# Altium PCB Brake Light Flasher.PcbDoc
Units mm, origin at the board's own origin, x right, y up, seen from the top; angles counter-clockwise.
Board outline 22.5 x 17.5 mm, 2 copper layers (L1, L2), stack 1.571 mm thick; 36 components, 22 nets, 92 pads, 32 vias.
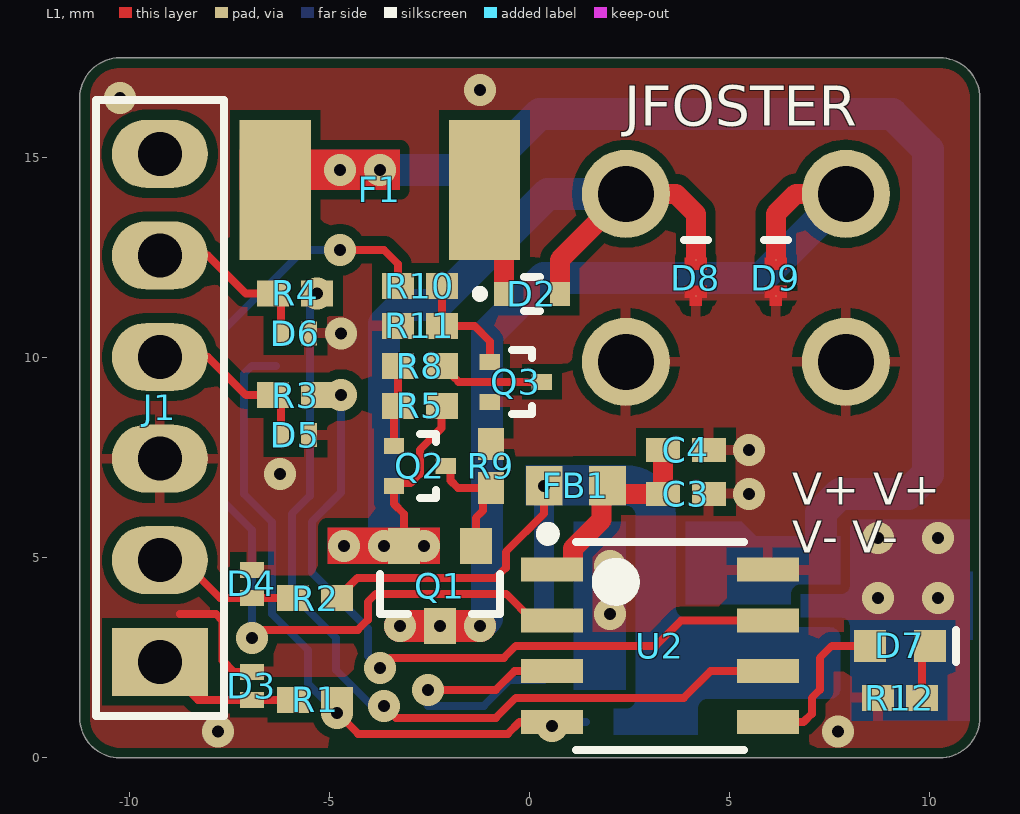
[diagram p0: L1 view]
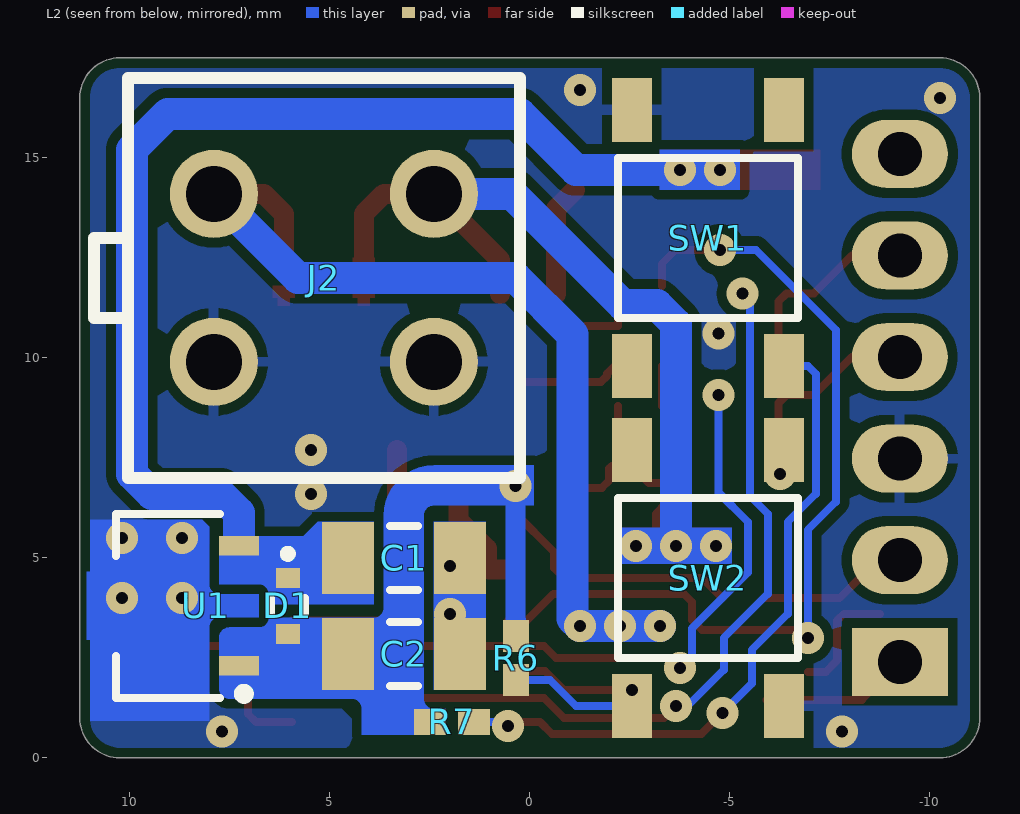
[diagram p1: L2 view, seen from below]

## Layer stack, top to bottom
Top Solder: solder mask 0.0102, Solder Resist, Dk 3.5
L1: signal copper 0.0356
Dielectric 1: dielectric 1.5, FR-4, Dk 4.8
L2: signal copper 0.0356
Bottom Solder: solder mask 0.0102, Solder Resist, Dk 3.5

## Board outline
-11.25,1 ccw(c-10.25,1) -10.25,0 10.25,0 ccw(c10.25,1) 11.25,1 11.25,16.5 ccw(c10.25,16.5) 10.25,17.5 -10.25,17.5 ccw(c-10.25,16.5) -11.25,16.5

## Design rules (kind name [scope] priority, off if disabled: settings)
BoardOutlineClearance BoardOutlineClearance_Silk [( HasFootprint('MOLEX_0039281043') Or HasFootprint('MICROCHIP_PKG_SOIC-8(C04-2057-SN)') ) And OnSilkscreen] p1: gap=0 ignorepadtopadclearanceinfootprint=FALSE
BoardOutlineClearance BoardOutlineClearance_UMW [HasFootprint('UMW_PKG_SOT-89-3')] p2: gap=0.15 ignorepadtopadclearanceinfootprint=FALSE except(0: Arc-SplitContinuation Track-SplitContinuation SMDPad-SplitContinuation THPad-SplitContinuation Via-SplitContinuation Fill-SplitContinuation Poly-SplitContinuation Region-SplitContinuation Text-SplitContinuation)
BoardOutlineClearance [All] p3: gap=0.25 ignorepadtopadclearanceinfootprint=FALSE except(0: Arc-SplitContinuation Track-SplitContinuation SMDPad-SplitContinuation THPad-SplitContinuation Via-SplitContinuation Fill-SplitContinuation Poly-SplitContinuation Region-SplitContinuation Text-SplitContinuation)
Clearance Clearance_78L05 [HasFootprint('UMW_PKG_SOT-89-3')] p1: gap=0.1 ignorepadtopadclearanceinfootprint=FALSE except(0.24: Arc-Fill Arc-Poly Arc-Region Track-Fill Track-Poly Track-Region SMDPad-Fill SMDPad-Poly SMDPad-Region THPad-Fill THPad-Poly THPad-Region Via-Fill Via-Poly Via-Region Fill-Fill Fill-Poly Fill-Region Poly-Poly Poly-Region Region-Region)
Clearance [All] p2: gap=0.1 ignorepadtopadclearanceinfootprint=FALSE except(0.245: Arc-Region Track-Region SMDPad-Region THPad-Region Via-Region Fill-Region Region-Region; 0.25: Arc-Fill Arc-Poly Track-Fill Track-Poly SMDPad-Fill SMDPad-Poly THPad-Fill THPad-Poly Via-Fill Via-Poly Fill-Fill Fill-Poly Poly-Poly Poly-Region)
MinimumSolderMaskSliver [All] p1: minsoldermaskwidth=0.1
PolygonConnect PolygonConnect_Via [IsVia] p1: connectstyle=Direct reliefconductorwidth=0.25 reliefentries=4 polygonreliefangle="90 Angle" airgapwidth=0.254
PolygonConnect PolygonConnect_Def [All] p2: connectstyle=Relief reliefconductorwidth=0.25 reliefentries=4 polygonreliefangle="90 Angle" airgapwidth=0.25
RoutingVias [All] p1: holewidth=0.711 width=1.27 viastyle="Through Hole" minholewidth=0.711 minwidth=1.27 maxholewidth=0.711 maxwidth=1.27
SilkToSolderMaskClearance [IsPad] p1: minsilkscreentomaskgap=0.15 clearancetoexposedcopper=TRUE
SolderMaskExpansion SolderMaskExpansion_Via [IsVia] p1: expansion=0 istentingtop=TRUE
SolderMaskExpansion [All] p2: expansion=0.05 istentingtop=FALSE
Width [All] p1: maxlimit=3 minlimit=0.1 preferedwidth=0.3
28 further rules are at their usual default settings.

## Classes and differential pairs
component class "Brake Light Flasher": C1 C2 C3 C4 D1 D2 D3 D4 D5 D7 D8 D9 F1 FB1 J1 J2 Q1 Q2 Q3 R1 R2 R4 R5 R6 R7 R8 R9 R10 R11 R12 SW1 SW2 U1 U2

## Components (designator, comment, footprint, x,y, rotation, side; value= is the part's Value field where it differs from the comment)
C1 "10uF,20%,50V,X5R,1206" CAPC3216X16N 3.15,5 r0 bottom value=10u
C2 "10uF,20%,50V,X5R,1206" CAPC3216X16N 3.15,2.6 r0 bottom value=10u
C3 "1nF,10%,50V,X7R,0402" CAPC1005X06N 3.9,6.6 r180 top value=1n
C4 "100nF,10%,50V,X7R,0402" CAPC1005X06N 3.9,7.7 r180 top value=100n
D1 "1N4148WT" ONSEMI_PKG_SOD-523F 6.05,3.8 r270 bottom
D2 "1N4148WT" ONSEMI_PKG_SOD-523F 0.05,11.6 r0 top
D3 "ESDSLC5V0LB-TP" MICROCOMMERCIAL_DFN1006-2_NPOL -6.95,1.801 r270 top
D4 "ESDSLC5V0LB-TP" MICROCOMMERCIAL_DFN1006-2_NPOL -6.95,4.35 r270 top
D5 "ESDSLC5V0LB-TP" MICROCOMMERCIAL_DFN1006-2_NPOL -5.867,8.07 r180 top
D6 "ESDSLC5V0LB-TP" MICROCOMMERCIAL_DFN1006-2_NPOL -5.867,10.61 r180 top
D7 "Yellow" LITE-ON_LTST-C190KSKT 9.25,2.8 r0 top
D8 "VESD12C1-HD1-G3-08" VISHAY_PKG_DFN1006-2A 4.15,12 r270 top
D9 "VESD12C1-HD1-G3-08" VISHAY_PKG_DFN1006-2A 6.15,12 r270 top
F1 "500mA" BELFUSE_CHIP1812 -3.75,14.2 r180 top
FB1 "600R,0603" INDC_0603 1.15,6.8 r180 top
J1 "Term,Header,6 Pin,Top,2.54mm" WURTH_61300611121 -9.25,8.75 r90 top
J2 "0039281043" MOLEX_0039281043 5.15,12 r270 bottom
Q1 "DMP3099L-7" DIODES_SOT23 -2.25,4.3 r270 top
Q2 "MMBT4403T-7-F" DIODES_SOT523 -2.75,7.3 r0 top
Q3 "MMBT2222AT-7-F" SOTFL50P160X90-3N -0.35,9.4 r0 top
R1 "49R9,1%,0.063W,0402" RESC1005X04N -5.367,1.45 r0 top value=49.9
R2 "150R,1%,0.063W,0402" RESC1005X04N -5.367,3.99 r180 top value=150
R3 "49R9,1%,0.063W,0402" RESC1005X04N -5.867,9.07 r0 top value=49.9
R4 "49R9,1%,0.063W,0402" RESC1005X04N -5.867,11.61 r0 top value=49.9
R5 "10k,5%,0.063W,0402" RESC1005X04N -2.75,8.8 r0 top value=10k
R6 "10k,5%,0.063W,0402" RESC1005X04N 0.35,2.5 r90 bottom value=10k
R7 "10k,5%,0.063W,0402" RESC1005X04N 1.95,0.9 r0 bottom value=10k
R8 "10k,5%,0.063W,0402" RESC1005X04N -2.75,9.8 r180 top value=10k
R9 "10k,5%,0.063W,0402" RESC1005X04N -0.975,7.3 r270 top value=10k
R10 "10k,5%,0.063W,0402" RESC1005X04N -2.75,11.8 r180 top value=10k
R11 "10k,5%,0.063W,0402" RESC1005X04N -2.75,10.8 r0 top value=10k
R12 "620R,1%,0.063W,0402" RESC1005X04N 9.25,1.5 r180 top value=620
SW1 "PTS525SM15SMTR2 LFS" "C&K_PTS525SM15SMTR2 LFS" -4.45,13 r270 bottom
SW2 "PTS525SM15SMTR2 LFS" "C&K_PTS525SM15SMTR2 LFS" -4.45,4.5 r90 bottom
U1 "L78L05A(UMW)" UMW_PKG_SOT-89-3 9.05,3.8 r90 bottom
U2 "PIC16F15213-I/SN" MICROCHIP_PKG_SOIC-8(C04-2057-SN) 3.25,2.8 r0 top

## Footprints (in the part's own frame and the unit in brackets; to place one, negate y for a bottom-side part, rotate by r counter-clockwise, add the part's x,y. Pads: shape width x height; smd on the part's side, far side on the other; paste and mask are expansions set on the pad)
BELFUSE_CHIP1812 [mm] "BELFUSE_CHIP1812"
  rect 1.78x3.5 smd: 1(-2.615,0) 2(2.615,0)
  body extent -2.27,-1.62 2.27,1.62, height 0.7
"C&K_PTS525SM15SMTR2 LFS" [mm] "C&K_PTS525SM15SMTR2 LFS"
  rect 1.6x1 smd mask+0.05: 1(-3.2,1.9) 2(3.2,1.9) 3(-3.2,-1.9) 4(3.2,-1.9)
  silkscreen extent -2,-2.25 2,2.25, body extent -3.2,-2.55 3.2,2.55, height 1.6
CAPC1005X06N [mm]
  rect 0.85x0.6 smd: 1(-0.575,0) 2(0.575,0)
  body extent -0.53,-0.28 0.53,0.27, height 0.55
CAPC3216X16N [mm] "Chip Capacitor, 2-Leads, Body 3.20x1.60mm, IPC Medium Density"
  rect 1.3x1.8 smd: 1(-1.4,0) 2(1.4,0)
  silkscreen extent -0.35,-0.8 0.35,0.8, body extent -1.75,-0.95 1.75,0.95, height 1.6
DIODES_SOT23 [mm] "DIODES_SOT23"
  rect 0.9x0.8 smd: 1(-1,0.9) 2(-1,-0.9) 3(1,0)
  silkscreen extent -0.3,-1.5 0.7,1.5, body extent -0.7,-1.5 0.7,1.5, height 1.15
DIODES_SOT523 [mm] "DIODES_SOT523"
  rect 0.51x0.4 smd mask+0.05: 1(-0.645,0.5) 2(-0.645,-0.5) 3(0.645,0)
  silkscreen extent 0,-0.8 0.4,0.8, body extent -0.8,-0.78 0.8,0.8, height 0.76
INDC_0603 [mm]
  rect 0.92x0.98 smd: 1(-0.79,0) 2(0.79,0)
  body extent -0.88,-0.48 0.87,0.47, height 0.95
LITE-ON_LTST-C190KSKT [mm] "LITE-ON_LTST-C190KSKT"
  rect 0.8x0.8 smd: A(-0.75,0) C(0.75,0)
  silkscreen extent 1.4,-0.4 1.4,0.4, body extent -0.8,-0.4 0.8,0.4, height 0.8
MICROCHIP_PKG_SOIC-8(C04-2057-SN) [mm]
  rect 1.55x0.6 smd: 1(-2.7,1.905) 2(-2.7,0.635) 3(-2.7,-0.635) 4(-2.7,-1.905) 5(2.7,-1.905) 6(2.7,-0.635) 7(2.7,0.635) 8(2.7,1.905)
  silkscreen extent -2.95,-2.6 2.1,2.95, body extent -2.1,-2.6 2.1,2.6, height 1.75
MICROCOMMERCIAL_DFN1006-2_NPOL [mm] "MICROCOMMERCIAL_DFN1006-2_NPOL"
  rect 0.4x0.6 smd: 1(-0.35,0) 2(0.35,0)
  body extent -0.5,-0.3 0.5,0.3, height 0.55
MOLEX_0039281043 [mm]
  round 2.2 hole 1.4: 1(-2.1,2.75) 2(2.1,2.75) 3(-2.1,-2.75) 4(2.1,-2.75)
  silkscreen extent -5,-5.75 5,4.9, body extent -5.2,-6 5.2,5, height 12.8
ONSEMI_PKG_SOD-523F [mm]
  rect 0.5x0.6 smd: 1(-0.7,0) 2(0.7,0)
  silkscreen extent -1.4,-0.43 0.2,0.43, body extent -0.63,-0.43 0.63,0.43, height 0.65
RESC1005X04N [mm] "Chip Resistor, 2-Leads, Body 1.0x0.5mm, IPC Medium Density"
  rect 0.8x0.65 smd: 1(-0.55,0) 2(0.55,0)
  body extent -0.52,-0.27 0.53,0.28, height 0.4
SOTFL50P160X90-3N [mm] "SOTFL, 3-Leads, Body 1.60x1.60mm, Pitch 0.50mm, IPC Medium Density"
  rect 0.51x0.4 smd: 1(-0.65,0.5) 2(-0.65,-0.5) 3(0.65,0)
  silkscreen extent -0.1,-0.8 0.4,0.8, body extent -0.4,-0.8 0.4,0.8, height 0.9
UMW_PKG_SOT-89-3 [mm]
  rect 0.48x1 smd: 1(-1.5,-1.775) 3(1.5,-1.775)
  round 0.025 smd: 2(0,-0.125)
  L1 region: -0.53,-1.035 -0.438,-1.053 -0.36,-1.105 -0.308,-1.183 -0.29,-1.275 -0.29,-1.275 -0.29,-2.275 0.29,-2.275 0.29,-1.275 0.308,-1.183 0.36,-1.105 0.438,-1.053 0.53,-1.035 0.53,-1.035 0.85,-1.035 0.942,-1.017 1.02,-0.965 1.072,-0.887 1.09,-0.795 1.09,-0.795 1.09,1.035 0.998,1.053 0.92,1.105 0.868,1.183 0.85,1.275 0.85,1.275 0.85,2.025 -0.21,2.025 -0.21,2.025 -0.85,2.025 -0.85,1.275 -0.868,1.183 -0.92,1.105 -0.998,1.053 -1.09,1.035 -1.09,1.035 -1.09,-0.795 -1.072,-0.887 -1.02,-0.965 -0.942,-1.017 -0.85,-1.035 -0.85,-1.035
  silkscreen extent -2.32,-2.02 2.3,1.3, body extent -2.27,-1.27 2.28,1.28, height 1.55
VISHAY_PKG_DFN1006-2A [mil]
  round 1 smd: 1(17.72,0) 2(-17.72,0)
  L1 region: 27.56,-5.91 27.56,5.91 19.68,5.91 19.68,10.83 7.87,10.83 7.87,-10.83 19.68,-10.83 19.68,-5.91
  L1 region: -27.56,-5.91 -27.56,5.91 -19.68,5.91 -19.68,10.83 -7.87,10.83 -7.87,-10.83 -19.68,-10.83 -19.68,-5.91
  silkscreen extent -37,-12 -37,12, body extent -21,-13 21,13, height 20
WURTH_61300611121 [mm]
  rect 1.7x2.4 hole 1.1 mask+0.05: 1(-6.35,0)
  oval 1.7x2.4 hole 1.1 mask+0.05: 2(-3.81,0) 3(-1.27,0) 4(1.27,0) 5(3.81,0) 6(6.35,0)
  silkscreen extent -7.7,-1.6 7.7,1.6, body extent -7.62,-1.27 7.62,1.27, height 8.55

## Part data
C1 C2: library part CAP,Cer,10uF,50VDC,X5R,1206, "10ï¿½F ï¿½20% 50V Ceramic Capacitor X5R 1206 (3216 Metric)", Manufacturer 1="Samsung Electro-Mechanics", Manufacturer 1 Part Number=CL31A106MBHNNNE, Vendor 1 Part Number=1276-6736-1-ND, CreatedBy="Judd Foster", HelpURL=https://www.samsungsem.com/resources/file/global/support/product_catalog/MLCC.pdf, Part Name=CAP,Cer,10uF,50VDC,X5R,1206, Vendor 1=Digikey
C3: library part CAP,Cer,1nF,10%,50V,X7R,0402, "1000pF ï¿½10% 50V Ceramic Capacitor X7R 0402 (1005 Metric)", Manufacturer 1="Murata Electronics", Manufacturer 1 Part Number=GCM155R71H102KA37D, Vendor 1 Part Number=490-4761-1-ND, CreatedBy="Judd Foster", HelpURL=https://www.murata.com/~/media/webrenewal/support/library/catalog/products/capacitor/mlcc/c03e.ashx?la=en-us, Part Name=CAP,Cer,1nF,10%,50V,X7R,0402, Vendor 1=Digikey
C4: library part CAP,Cer,100nF,10%,50V,X7R,0402, "50V 100nF X7R Â±10% 0402 Ceramic Capacitors ROHS", Manufacturer 1=Murata, Manufacturer 1 Part Number=GRM155R71H104KE14D, Vendor 1 Part Number=C77020, CreatedBy="Judd Foster", HelpURL=https://www.lcsc.com/datasheet/C77020.pdf, Part Name=CAP,Cer,100nF,10%,50V,X7R,0402, Vendor 1=LCSC
D1 D2: library part DIODE,Gen,75V,150mA,SOD523F, "Diode 75 V 200mA Surface Mount SOD-523F", Manufacturer 1=onsemi, Vendor 1 Part Number=1N4148WTCT-ND, CreatedBy="Judd Foster", HelpURL=https://mm.digikey.com/Volume0/opasdata/d220001/medias/docus/6621/1N914BWTCND.pdf, Manufacturer 1 Part Number=1N4148WT, Part Name=DIODE,Gen,75V,150mA,SOD523F, Vendor 1=DigiKey
D3 D4 D5 D6: library part DIODE,TVS,5.0V,SOD882, "20V Clamp 4A (8/20ï¿½s) Ipp Tvs Diode Surface Mount 2-DFN1006", Manufacturer 1="Micro Commercial Co", Vendor 1 Part Number=ESDSLC5V0LB-TPMSCT-ND, CreatedBy="Judd Foster", HelpURL=https://www.mccsemi.com/pdf/Products/ESDSLC5V0LB(DFN1006-2).pdf, Manufacturer 1 Part Number=ESDSLC5V0LB-TP, Part Name=DIODE,TVS,5.0V,SOD882, Vendor 1=Digikey
D7: library part LED,Yellow,SMD,0603, "Yellow 591nm LED Indication - Discrete 2.1V 0603 (1608 Metric)", Manufacturer 1="Lite-On Inc.", Manufacturer 1 Part Number=LTST-C190KSKT, Vendor 1 Part Number=160-1437-1-ND, CreatedBy="Judd Foster", HelpURL=https://optoelectronics.liteon.com/upload/download/DS-22-99-0189/LTST-C190KSKT.pdf, Part Name=LED,Yellow,SMD,0603, Vendor 1=Digikey
D8 D9: library part DIODE,ESD,12V,DFN1006-2A, "Transient Voltage Suppression Diodes - TVS ESD 12V UNI", Manufacturer 1=Vishay, Vendor 1 Part Number=78-VESD12C1-HD1-G308, CreatedBy="Judd Foster", HelpURL=https://www.vishay.com/docs/86185/vesd01c1-hd1tovesd33c1-hd1.pdf, Manufacturer 1 Part Number=VESD12C1-HD1-G3-08, Part Name=DIODE,ESD,12V,DFN1006-2A, Vendor 1=Mouser
F1: library part PTC,30V,500mA,1812, "Polymeric PTC Resettable Fuse 30V 500 mA Ih Surface Mount 1812 (4532 Metric), Concave", Manufacturer 1="Bel Fuse Inc.", Manufacturer 1 Part Number=0ZCG0050AF2C, Vendor 1 Part Number=507-1762-1-ND, CreatedBy="Judd Foster", HelpURL=https://www.belfuse.com/resources/datasheets/circuitprotection/ds-cp-0zcg-series.pdf, Part Name=PTC,30V,500mA,1812, Vendor 1=Digikey
FB1: library part FERRITE,600R@100MHz,350mA,0603, "500mÎ© Â±25% 600Î©@100MHz 0603 Ferrite Beads and Chips ROHS", Manufacturer 1=TAI-TECH, Manufacturer 1 Part Number=FCM1608KF-601T03, Vendor 1 Part Number=C141723, CreatedBy="Judd Foster", HelpURL=https://www.lcsc.com/datasheet/C141723.pdf, Part Name=FERRITE,600R@100MHz,350mA,0603, Vendor 1=LCSC
J1: "Connector Header Through Hole 6 position 0.100\" (2.54mm)", Manufacturer 1="WÃ¼rth Elektronik", Manufacturer 1 Part Number=61300611121, Vendor 1 Part Number=732-5319-ND, CreatedBy="Judd Foster", HelpURL=https://www.we-online.com/components/products/datasheet/61300611121.pdf, Part Name="Term,Header,6 Pin,Top,2.54mm", Vendor 1=DigiKey
J2: library part CONN,Mini-Fit-Jr,Hdr,2x2,Pos,Vert,Thru, "Connector Header Through Hole 4 position 0.165\" (4.20mm)", Manufacturer 1=Molex, Vendor 1 Part Number=WM3801-ND, CreatedBy="Judd Foster", HelpURL=https://www.molex.com/en-us/products/part-detail/39281043?display=pdf, Manufacturer 1 Part Number=0039281043, Part Name=CONN,Mini-Fit-Jr,Hdr,2x2,Pos,Vert,Thru, Vendor 1=DigiKey
Q1: library part "MOSFET,P Ch,30V,3.8A", "P-Channel 30 V 3.8A (Ta) 1.08W (Ta) Surface Mount SOT-23-3", Manufacturer 1="Diodes Incorporated", Vendor 1 Part Number=DMP3099L-7DICT-ND, CreatedBy="Judd Foster", HelpURL=https://www.diodes.com/assets/Datasheets/DMP3099L.pdf, Manufacturer 1 Part Number=DMP3099L-7, Part Name="MOSFET,P Ch,30V,3.8A", Vendor 1=Digikey
Q2: library part Trans,PNP,40V,600mA,SOT523, "Bipolar (BJT) Transistor PNP 40 V 600 mA 200MHz 150 mW Surface Mount SOT-523", Manufacturer 1="Diodes Incorporated", Vendor 1 Part Number=MMBT4403T-FDICT-ND, CreatedBy="Judd Foster", HelpURL=https://www.diodes.com/assets/Datasheets/ds30273.pdf, Manufacturer 1 Part Number=MMBT4403T-7-F, Part Name=Trans,PNP,40V,600mA,SOT523, Vendor 1=Digikey
Q3: library part Trans,NPN,40V,600mA,SOT523, "Bipolar (BJT) Transistor NPN 40 V 600 mA 300MHz 150 mW Surface Mount SOT-523", Manufacturer 1="Diodes Incorporated", Vendor 1 Part Number=MMBT2222AT-FDICT-ND, CreatedBy="Judd Foster", HelpURL=https://media.digikey.com/pdf/Data%20Sheets/Diodes%20PDFs/MMBT2222AT_Rev2016.pdf, Manufacturer 1 Part Number=MMBT2222AT-7-F, Part Name=Trans,NPN,40V,600mA,SOT523, Vendor 1=Digikey
R1 R3 R4: library part RES,49R9,1%,0.063W,0402, "49.9 Ohms Â±1% 0.063W, 1/16W Chip Resistor 0402 (1005 Metric) Moisture Resistant Thick Film", Manufacturer 1=YAGEO, Manufacturer 1 Part Number=RC0402FR-0749R9L, Vendor 1 Part Number=311-49.9LRCT-ND, CreatedBy="Judd Foster", HelpURL=https://www.yageo.com/upload/media/product/products/datasheet/rchip/PYu-RC_Group_51_RoHS_L_12.pdf, Part Name=RES,49R9,1%,0.063W,0402, Vendor 1=DigiKey
R2: library part RES,150R,1%,0.1W,0402, "150 Ohms ï¿½1% 0.063W, 1/16W Chip Resistor 0402 (1005 Metric) Automotive AEC-Q200, Moisture Resistant Thick Film", Manufacturer 1="TE Connectivity Passive Product", Manufacturer 1 Part Number=CRGCQ0402F150R, Vendor 1 Part Number=A129617CT-ND, CreatedBy="Judd Foster", HelpURL=https://www.te.com/commerce/DocumentDelivery/DDEController?Action=srchrtrv&DocNm=1773204-3&DocType=DS&DocLang=English, Part Name=RES,150R,1%,0.1W,0402, Vendor 1=Digikey
R5 R6 R7 R8 R9 R10 R11: library part RES,10k,5%,0.063W,0402, "10 kOhms ï¿½5% 0.063W, 1/16W Chip Resistor 0402 (1005 Metric) Automotive AEC-Q200 Thick Film", Manufacturer 1="Stackpole Electronics Inc", Manufacturer 1 Part Number=RMCF0402JT10K0, Vendor 1 Part Number=RMCF0402JT10K0CT-ND, CreatedBy="Judd Foster", HelpURL=https://www.seielect.com/catalog/sei-rmcf_rmcp.pdf, Part Name=RES,10k,5%,0.063W,0402, Vendor 1=DIgikey
R12: library part RES,620R,1%,0.063W,0402, "620 Ohms Â±1% 0.063W, 1/16W Chip Resistor 0402 (1005 Metric) Thin Film", Manufacturer 1=YAGEO, Manufacturer 1 Part Number=RT0402FRE07620RL, Vendor 1 Part Number=13-RT0402FRE07620RLCT-ND, CreatedBy="Judd Foster", HelpURL=https://www.yageo.com/upload/media/product/app/datasheet/rchip/pyu-rt_1-to-0.01_rohs_l.pdf, Part Name=RES,620R,1%,0.063W,0402, Vendor 1=DigiKey
SW1 SW2: library part Switch,Tactile,SPST-NO,SMD,H1.5, "Tactile Switch SPST-NO Top Actuated Surface Mount", Manufacturer 1=C&K, Vendor 1 Part Number=CKN9104CT-ND, CreatedBy="Judd Foster", HelpURL=https://www.ckswitches.com/media/1467/pts525.pdf, Manufacturer 1 Part Number="PTS525SM15SMTR2 LFS", Part Name=Switch,Tactile,SPST-NO,SMD,H1.5, Vendor 1=Digikey
U1: "Linear Voltage Regulator IC Positive Fixed 1 Output 100mA SO-8", Manufacturer 1=UMW, Vendor 1 Part Number=C2681223, CreatedBy="Judd Foster", HelpURL=https://www.lcsc.com/datasheet/C2681223.pdf?spm=wm.sxq.inf.ggs___wm.ssy.bg.7.xh&lcsc_vid=TgUPBFBSFFFWXgUFE1cMXgdVTgVYX1NfTlZZX1NSQlYxVlNRQFBbVVFWQFdYVTsOAxUeFF5JWBYZEEoKFBINSQcJGk4%3D, Manufacturer 1 Part Number=L78L05A(UMW), Part Name=L78L05A(UMW), Vendor 1=LCSC
U2: library part PIC16F15213-I_SN, "PIC PICÂ® 16F, Functional Safety (FuSa) Microcontroller IC 8-Bit 32MHz 3.5KB (2K x 14) FLASH 8-SOIC", Manufacturer 1=Microchip, Vendor 1 Part Number=150-PIC16F15213-I/SN-ND, CreatedBy="Judd Foster", HelpURL=https://ww1.microchip.com/downloads/en/DeviceDoc/PIC16F15213-14-23-24-43-44-Data-Sheet-40002195D.pdf, Manufacturer 1 Part Number=PIC16F15213-I/SN, Part Name=PIC16F15213-I_SN, Vendor 1=DigiKey

## Via types
v1: diameter 0.8, hole 0.3, L1 to L2, tented both sides, 32 vias

## Nets (pads, with @x,y where several pads share a name; then routed paths per layer and width w, separated by ;. In a path a pad name is that pad's centre, name@x,y a point inside that pad or via, vN(x,y) a via of type N, cw(c..) or ccw(c..) an arc to the next point about the centre after c; other vN are vias at no path point)
+5V0: C2.2 D1.2 FB1.2 R2.1 R6.2 R7.2 U1.1 | length 10.3
  L1 w0.2: R2.1 -4.307,4.5 -0.85,4.5 -0.6,4.75 -0.6,5.15 0.36,6.11 v1(0.36,6.8)
  L2 w0.5: 0.35,3.45 0.36,3.46 v1(0.36,6.8)
+12V.IN: D2.2 D8.2 J2.1 Q1.2 Q2.2 R5.2 | length 23.5
  L1 w0.2: Q1.2 -3.15,6.1 -3.395,6.345 Q2.2 -3.325,6.87 -2.98,6.87 -2.75,7.1 -2.75,7.7 -2.207,8.243 -2.207,8.793 R5.2
  L1 w0.5: D2.2 0.75,12.45 J2.1 3.65,14.1 4.15,13.6 D8.2
  L2 w0.8: v1(-3.65,5.3) -3.65,10.85 -3.175,11.325 -2.325,11.325 0.45,14.1 J2.1
  other v1: -4.65,5.3 -2.65,5.3
+12V.OUT: D9.2 J2.3 Q1.3 | length 24.9
  L1 w0.5: D9.2 6.15,13.6 6.65,14.1 J2.3
  L1 w0.8: v1(-3.25,3.3) v1(-2.25,3.3) v1(-1.25,3.3)
  L2 w0.8: v1(-3.25,3.3) v1(-2.25,3.3) v1(-1.25,3.3) -1.07,3.48 -1.07,10.58 0.35,12 5.8,12 J2.3
BTN_N: R6.1 SW2.1 U2.3 | length 6.5
  L1 w0.2: v1(-2.55,1.7) -0.85,1.7 -0.385,2.165 U2.3
  L2 w0.2: SW2.1 -1.15,1.3 -0.5,1.95 R6.1
COM: C1.1 C2.1 C3.1 C4.1 D3.1 D4.1 D5.1 D6.1 D8.1 D9.1 J1.3 J2.2 J2.4 Q3.2 R9.1 R11.1 R12.2 SW1.3 SW2.3 SW2.4 U1.2 U2.8 | length 3
  L1 w0.2: -8.75,3.6 -7.85,3.6 -7.682,3.432 -7.682,2.432 -7.401,2.151 D3.1
  other v1: -7.8,0.66 7.7,0.66 2,3.6 8.7,4 10.2,4 2,4.8 8.7,5.5 10.2,5.5 5.475,6.6 -6.25,7.1 5.475,7.7 -4.717,10.61 -10.25,16.5 -1.25,16.7
GATE: R10.2 U2.2 | length 22.7
  L1 w0.2: v1(-6.95,3) -6.75,3.2 -4.3,3.2 -4.05,3.45 -4.05,3.9 -3.85,4.1 -0.59,4.1 0.075,3.435 U2.2 ; v1(-4.75,12.7) -3.65,12.7 -3.3,12.35 R10.2
  L2 w0.2: v1@-6.95,2.7 v1(-6.95,3) -6.95,5.7 -7.65,6.4 -7.65,10.7 -5.65,12.7 v1(-4.75,12.7)
ICSPC: R4.2 U2.6 | length 21.9
  L1 w0.2: v1(-3.65,1.3) -3.35,1 -0.85,1 -0.35,1.5 3.85,1.5 4.515,2.165 U2.6
  L2 w0.2: v1(-5.317,11.61) -5.5,11.427 -5.5,6.55 -5.95,6.1 -5.95,4.1 -4.85,3 -4.85,2.2 -3.95,1.3 v1(-3.65,1.3)
ICSPD: R3.2 U2.7 | length 18
  L1 w0.2: v1(-3.75,2.25) -3.5,2.5 -0.65,2.5 -0.35,2.8 3.15,2.8 3.785,3.435 U2.7
  L2 w0.2: v1(-4.717,9.07) -4.717,6.633 -5.45,5.9 -5.45,4.633 -4.05,3.233 -4.05,2.55 v1(-3.75,2.25)
LED: D7.A U2.5 | length 4
  L1 w0.2: U2.5 6.845,0.895 7.05,1.1 7.05,1.5 7.25,1.7 7.25,2.5 7.55,2.8 D7.A
NetC1_2: C1.2 D1.1 F1.2 U1.3 | length 26.7
  L2 w0.8: v1(-3.75,14.7) -1.15,14.7 0.25,16.1 9.05,16.1 9.95,15.2 9.95,7.1 9.45,6.6 7.75,6.6 7.275,6.125 U1.3
  other v1: -4.75,14.7
NetC3_2: C3.2 C4.2 FB1.1 U2.1 | length 5.5
  L1 w0.5: U2.1 1.025,4.705 1.075,4.755 1.075,5.23 1.787,5.942 1.787,6.647 FB1.1 2.14,6.6 C3.2 C4.2
NetD2_1: D2.1 F1.1 | length 2.8
  L1 w0.5: F1.1 -0.65,13.715 D2.1
NetD3_2: D3.2 J1.1 R1.1 | length 3.7
  L1 w0.2: J1.1 -8.3,1.45 D3.2 ; D3.2 R1.1
NetD4_2: D4.2 J1.2 R2.2 | length 3.7
  L1 w0.2: J1.2 -8.69,4.94 -7.74,3.99 -6.95,3.99 R2.2
NetD5_2: D5.2 J1.4 R3.1 | length 4.3
  L1 w0.2: J1.4 -8.05,10.02 -7.1,9.07 R3.1 -6.415,9.07 -6.217,8.872 D5.2
NetD6_2: D6.2 J1.5 R4.1 | length 4.3
  L1 w0.2: J1.5 -8.05,12.56 -7.1,11.61 R4.1 -6.415,11.61 -6.217,11.412 D6.2
NetD7_C: D7.C R12.1 | length 1.4
  L1 w0.2: R12.1 9.8,2.6 D7.C
NetQ1_1: Q1.1 Q2.3 R9.2 | length 3.1
  L1 w0.2: Q2.3 -2.058,7.3 -1.985,7.227 -1.985,6.935 -1.8,6.75 R9.2 -1.165,6.56 -1.165,6.185 -1.35,6 Q1.1
NetQ2_1: Q2.1 R5.1 R8.2 | length 2
  L1 w0.2: Q2.1 -3.395,8.705 R5.1 R8.2
NetQ3_1: Q3.1 R10.1 R11.2 | length 2.9
  L1 w0.2: R10.1 R11.2 -1.386,10.8 -1,10.414 Q3.1
NetQ3_3: Q3.3 R8.1 | length 2.7
  L1 w0.2: R8.1 -2.125,9.8 -1.927,9.602 -1.927,9.549 -1.778,9.4 Q3.3
RST_N: R1.2 R7.1 SW1.2 U2.4 | length 16.9
  L1 w0.2: v1(-4.817,1.125) -4.291,0.599 -0.551,0.599 -0.255,0.895 U2.4
  L2 w0.2: SW1.2 -6.95,9.8 -7.15,9.6 -7.15,6.6 -6.45,5.9 -6.45,3.6 -5.55,2.7 -5.55,1.858 v1(-4.817,1.125) ; v1(0.55,0.795) 0.655,0.9 R7.1
pads on no net: J1.6 SW1.1 SW1.4 SW2.2

## Polygon pours and split planes (outlines as drawn)
COM on L1 "NONET_L-01_P-001" (solid, remove dead copper, pour order 0): -12.25,-0.7 -12.25,18.3 11.75,18.3 11.75,-0.7
COM on L2 "NONET_L-01_P-001" (solid, remove dead copper, pour order 1): -11.25,-0.7 -11.25,18.3 12.75,18.3 12.75,-0.7

## Other copper
L1:
  region net NetC1_2: -7.255,14.2 -3.25,14.2 -3.25,15.2 -7.255,15.2
  region net +12V.IN: -5.05,4.85 -2.25,4.85 -2.25,5.75 -5.05,5.75
L2:
  region net NetC1_2: 3.9,3.84 3.9,5.9 5.3,5.9 5.66,5.54 7.765,5.54 7.765,4.34 6.775,4.34 ccw(c6.775,4.09) 6.525,4.09 6.525,3.84
  region net COM: 2.4,1.7 2.4,5.9 1.1,5.9 1.1,1.7
  region net COM: 8.015,0.927 10.995,0.927 10.995,5.949 8.184,5.949 8.015,5.78
  region net +5V0: 2.1,1.225 2.4,1.225 ccw(c2.4,1.475) 2.65,1.475 2.65,6.06 ccw(c2.4,6.06) 2.4,6.31 -0.1,6.31 -0.1,7.31 2.4,7.31 cw(c2.4,6.06) 3.65,6.06 3.65,3.75 ccw(c3.9,3.75) 3.9,3.5 6.525,3.5 ccw(c6.775,3.51) 6.775,3.26 7.515,3.26 cw(c7.515,3.01) 7.765,3.01 7.765,1.725 cw(c7.515,1.725) 7.515,1.475 4.45,1.475 ccw(c4.45,1.225) 4.2,1.225 4.2,0.575 2.1,0.575
  region net NetC1_2: -5.253,14.2 -3.25,14.2 -3.25,15.2 -5.253,15.2
  region net +12V.IN: -5.05,4.85 -2.25,4.85 -2.25,5.75 -5.05,5.75

## Silkscreen, mask and mechanical layers (free items; w line width, h text height)
Top Overlay:
  text "JFOSTER" at 2.355,15.8 h1
  text "V+ V+ / V- V-" at 6.562,5.125 h0.8
Board Outline:
  the board outline again, w0.1
OL1:
  lines w0.01: -5.05,4.85 -5.05,5.75 -2.25,5.75 -2.25,4.85 -5.05,4.85
  lines w0.05: -12.25,-0.7 -12.25,18.3 11.75,18.3 11.75,-0.7 -12.25,-0.7 ; -7.255,13.7 -3.25,13.7 -3.25,14.7 -7.255,14.7 -7.255,13.7
OL2:
  lines w0.05: 3.9,3.5 6.525,3.5 ccw(c6.775,3.51) 6.775,3.26 7.515,3.26 cw(c7.515,3.01) 7.765,3.01 7.765,1.725 cw(c7.515,1.725) 7.515,1.475 4.45,1.475 ccw(c4.45,1.225) 4.2,1.225 4.2,0.575 2.1,0.575 2.1,1.225 2.4,1.225 ccw(c2.4,1.475) 2.65,1.475 2.65,6.06 ccw(c2.4,6.06) 2.4,6.31 -0.1,6.31 -0.1,7.31 2.4,7.31 cw(c2.4,6.06) 3.65,6.06 3.65,3.75 ccw(c3.9,3.75) 3.9,3.5 ; 6.775,4.09 7.775,4.09 ccw(c7.775,4.33) 8.015,4.33 8.015,4.65 ; -5.253,13.7 -5.253,14.7 -3.25,14.7 -3.25,13.7 -5.253,13.7 ; 3.9,3.84 3.9,5.9 5.3,5.9 5.66,5.54 7.765,5.54 7.765,4.34 6.775,4.34 ccw(c6.775,4.09) 6.525,4.09 6.525,3.84 3.9,3.84

## Dimensions
-11.25,1 to 11.25,1 on Dimensions
-10.25,0 to -10.25,17.5 on Dimensions